# Altium PCB ultrasonic_tank_monitor.PcbDoc
Units mm, origin at the board's own origin, x right, y up, seen from the top; angles counter-clockwise.
Board outline 80.25 x 90.25 mm, 2 copper layers (Top Layer, Bottom Layer), stack 1.57 mm thick; 63 components, 38 nets, 216 pads, 0 vias.
Unrouted connection lines stored in the file: 149.
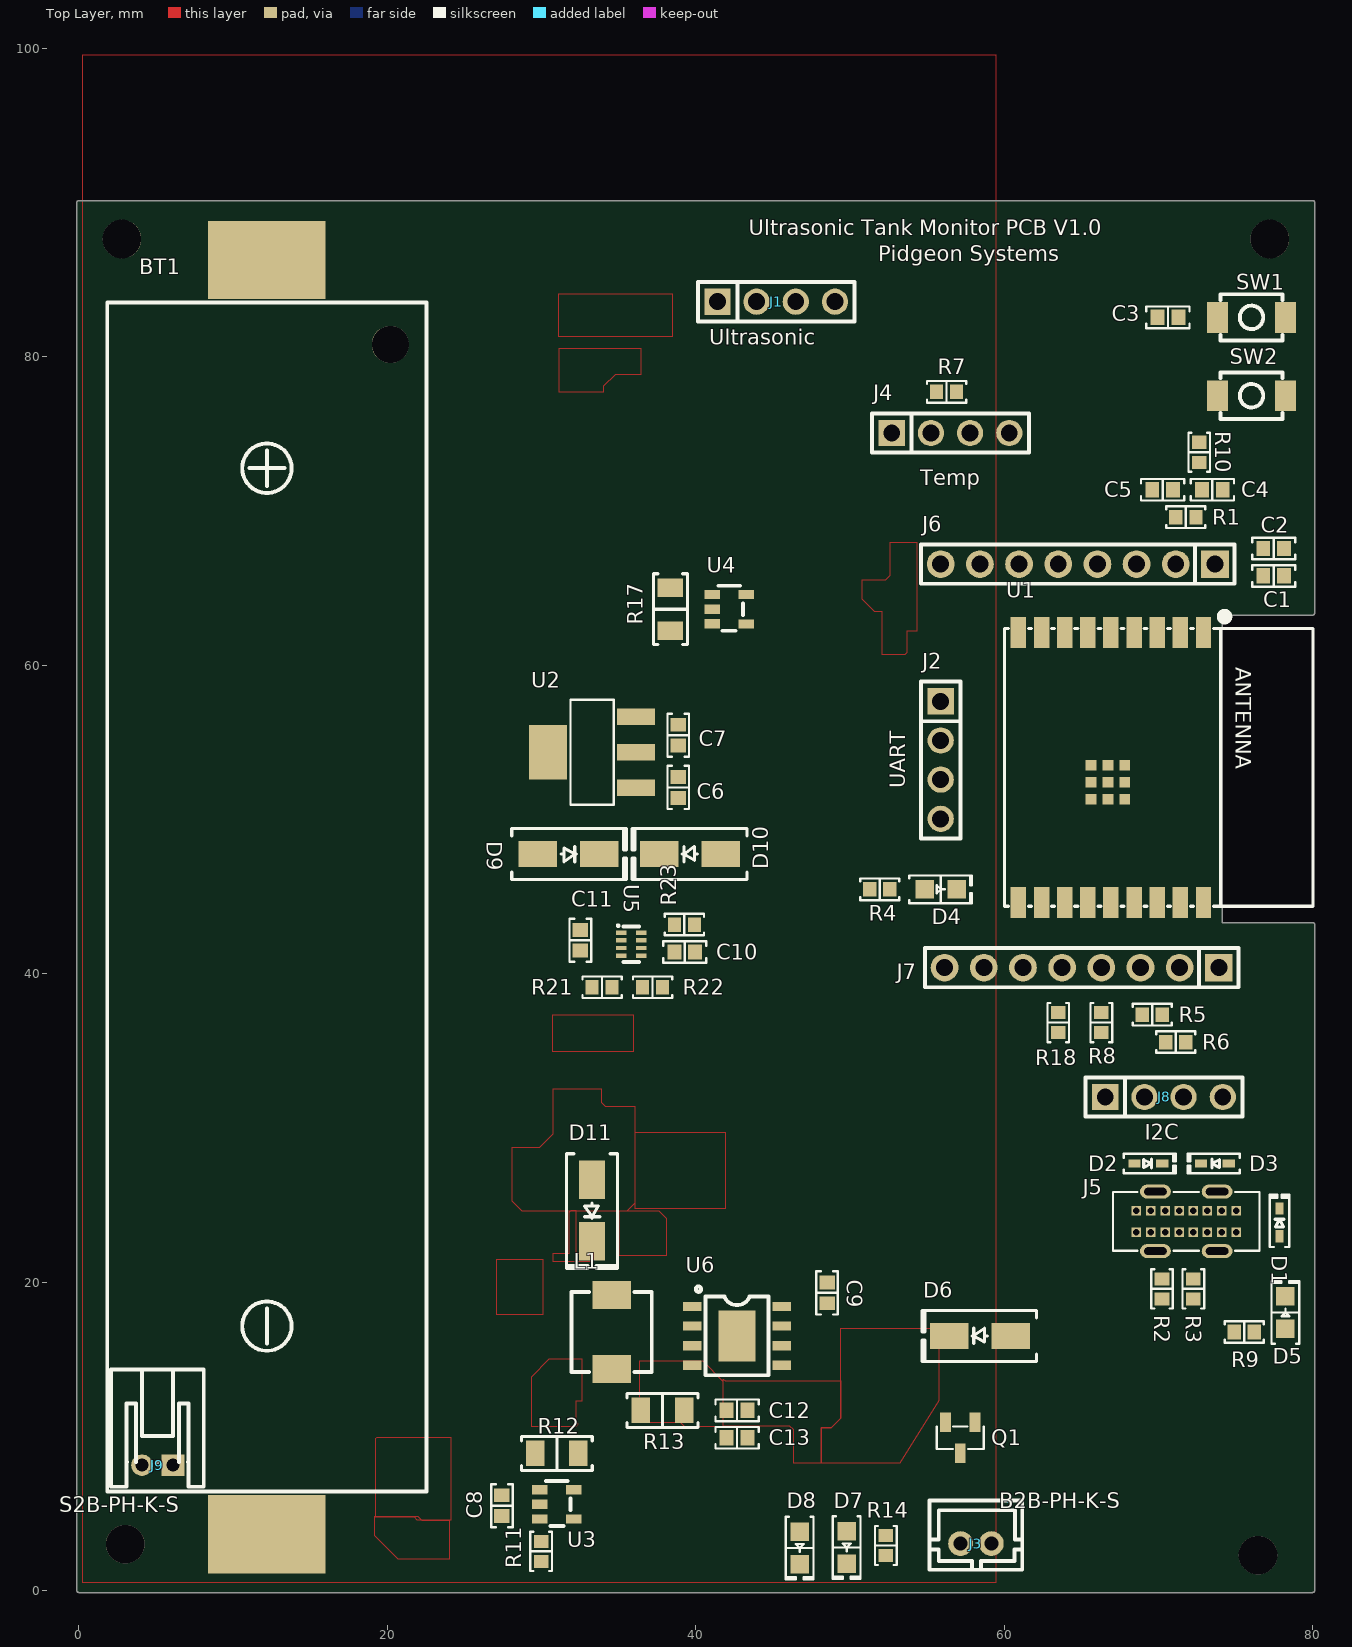
[diagram p0: Top Layer view]
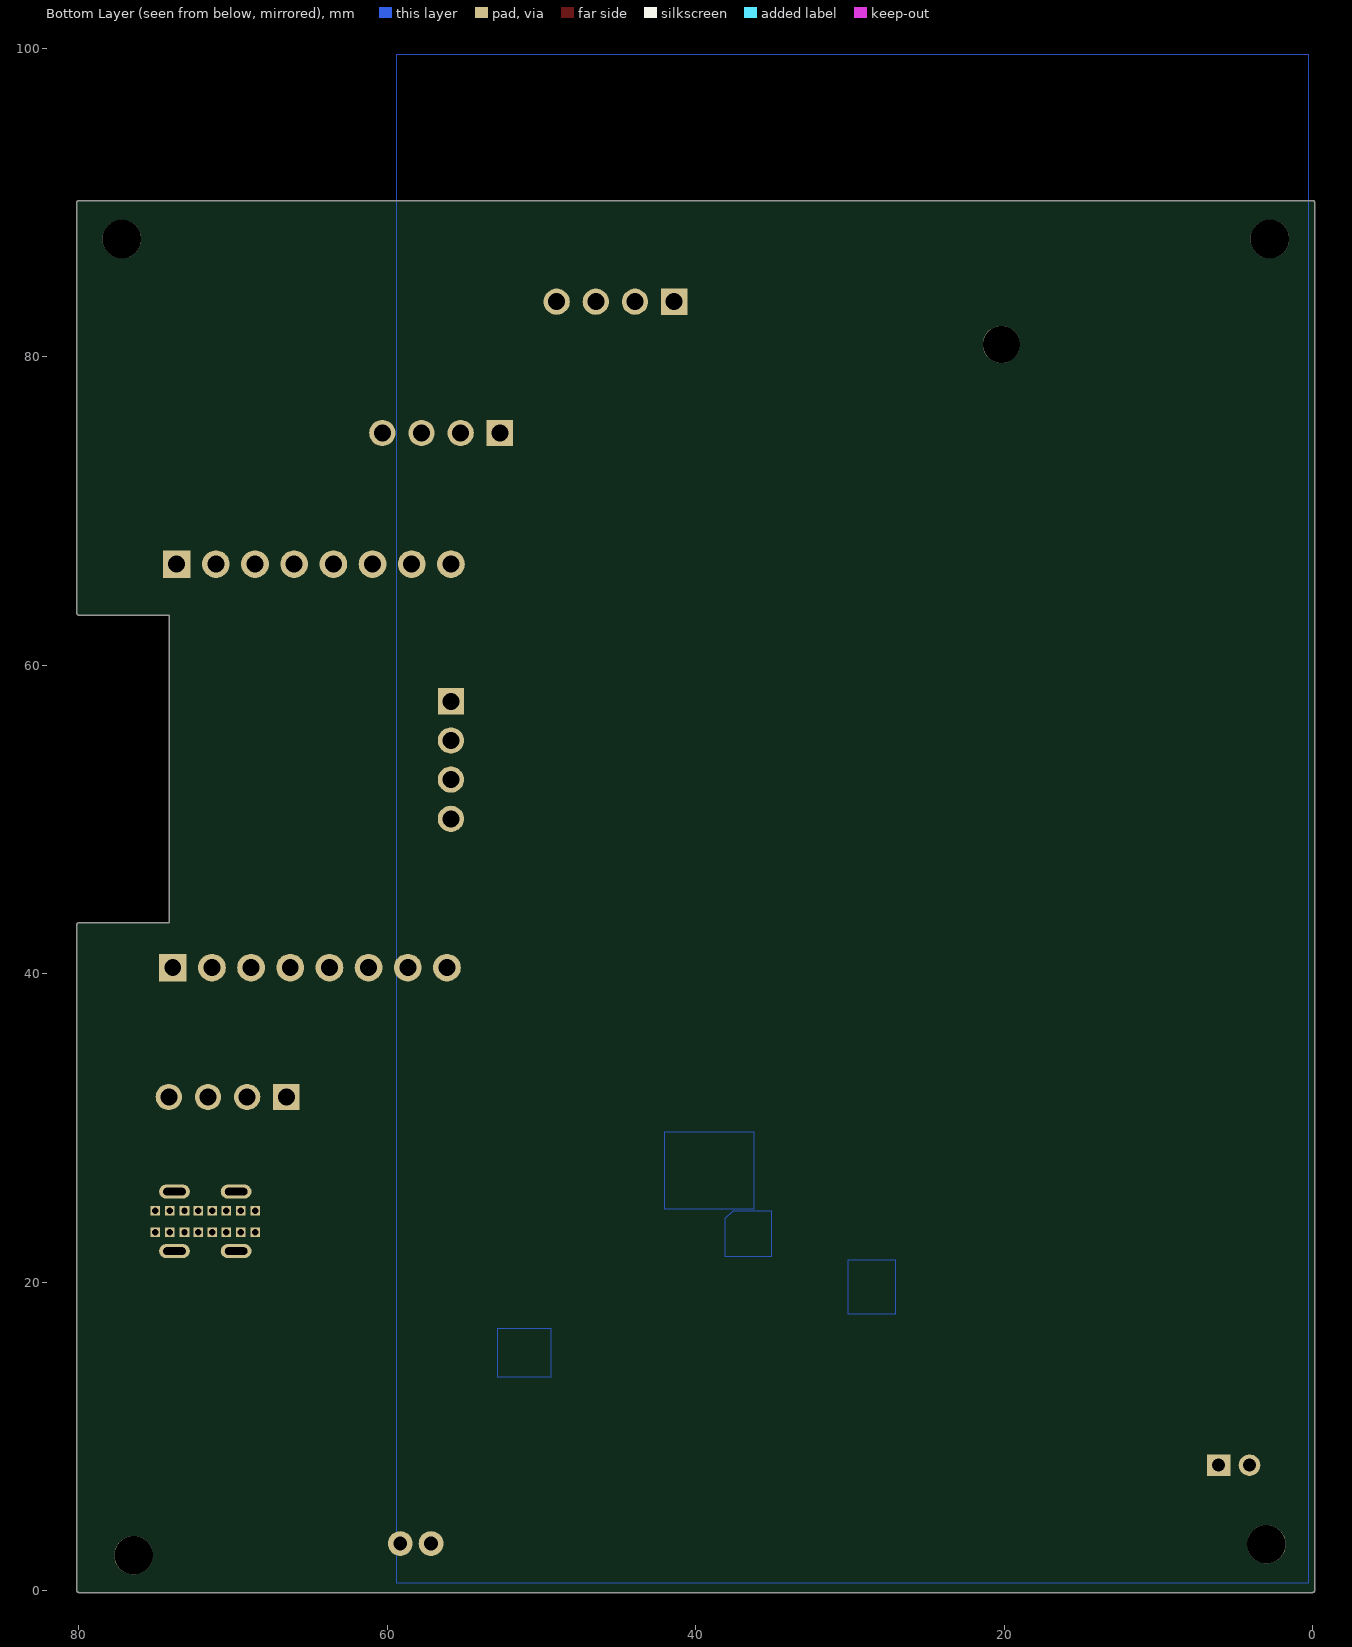
[diagram p1: Bottom Layer view, seen from below]

## Layer stack, top to bottom
Top Solder: solder mask 0.0127, Solder Resist, Dk 3.8
Top Layer: signal copper 0.035
Dielectric: core 1.5, FR-4, Dk 4.5
Bottom Layer: signal copper 0.035
Bottom Solder: solder mask 0.0127, Solder Resist, Dk 3.8

## Board outline
-0.127,0 -0.127,90 cw(c0,90) 0,90.127 80,90.127 cw(c80,90) 80.127,90 80.127,63.373 cw(c80,63.373) 80,63.246 74.127,63.246 74.127,43.307 80,43.307 cw(c80,43.18) 80.127,43.18 80.127,0 cw(c80,0) 80,-0.127 0,-0.127 cw(c0,0)

## Design rules (kind name [scope] priority, off if disabled: settings)
BoardOutlineClearance [All] p1: gap=0.2 ignorepadtopadclearanceinfootprint=FALSE
Clearance [All] p1: gap=0.127 ignorepadtopadclearanceinfootprint=FALSE except(0.125: Arc-Text Track-Text; 0.25: Arc-Hole Track-Hole SMDPad-Hole THPad-Hole Via-Hole Fill-Hole Poly-Hole Region-Hole Text-Hole; 0.254: Arc-Via Track-Via Via-Via)
ComponentClearance [All] p1: gap=0.127 collisioncheckmode=3 verticalgap=0.127 showdistances=TRUE
DiffPairsRouting [All] p1: maxlimit=0.254 minlimit=0.127 mostfreqgap=0.127 toplayer_minwidth=0.127 toplayer_maxwidth=25.4 toplayer_prefwidth=0.127 bottomlayer_minwidth=0.127 bottomlayer_maxwidth=25.4 bottomlayer_prefwidth=0.127 maxuncoupledlength=12.7
Height [All] p1: minheight=0 maxheight=1816.048 prefheight=12.7
HoleSize [All] p1: absolutevalues=TRUE maxlimit=6.3 minlimit=0.3 maxpercent=80.000 minpercent=20.000
HoleToHoleClearance [All] p1: gap=0.25 allowstackedmicrovias=FALSE
MinimumAnnularRing [All] p1: minimumring=0.076
MinimumSolderMaskSliver [All] p1: minsoldermaskwidth=0
PlaneClearance [All] p1: clearance=0.127
PlaneConnect PlaneConnectPowerPads [InPadClass('PowerPads')] p1: planeconnectstyle=Direct reliefexpansion=0.508 reliefentries=4 reliefconductorwidth=0.254 reliefairgap=0.254
PlaneConnect PlaneConnectPowerClass [InNetClass('Power')] p2: planeconnectstyle=Direct reliefexpansion=0.508 reliefentries=4 reliefconductorwidth=0.254 reliefairgap=0.254
PlaneConnect [All] p3: pad.planeconnectstyle=Relief pad.reliefexpansion=0.3 pad.reliefentries=4 pad.reliefconductorwidth=0.127 pad.reliefairgap=0.127 via.planeconnectstyle=Direct via.reliefexpansion=0.3 via.reliefentries=4 via.reliefconductorwidth=0.127 via.reliefairgap=0.127
PolygonConnect PolygonConnectPowerPads [All vs (InPadClass('PowerPads'))] p1: connectstyle=Direct reliefconductorwidth=0.254 reliefentries=4 polygonreliefangle="90 Angle" airgapwidth=0.254
PolygonConnect [All] p2: connectstyle=Direct reliefconductorwidth=0.127 reliefentries=4 polygonreliefangle="90 Angle" airgapwidth=0.127
RoutingVias [All] p1: holewidth=0.3 width=0.6 viastyle="Through Hole" minholewidth=0.3 minwidth=0.6 maxholewidth=0.6 maxwidth=6.6
SilkToSilkClearance [All] p1: silktosilkclearance=0
SilkToSolderMaskClearance [IsPad] p1: minsilkscreentomaskgap=0.125 clearancetoexposedcopper=TRUE
SolderMaskExpansion SolderMaskExpansion_1 [IsVia] p1: expansion=0.102 istentingtop=TRUE
SolderMaskExpansion [All] p2: expansion=0.075 istentingtop=FALSE
Width [All] p1: maxlimit=25.4 minlimit=0.127 preferedwidth=0.127 minimp=50.000000 maximp=50.000000 favimp=50.000000
20 further rules are at their usual default settings.

## Classes and differential pairs
component class ultrasonic_tank_monitor_power: C6 C7 C11 C12 D9 D10 R21 R22 R23 U2 U5
component class ultrasonic_tank_monitor_battery: BT1 C8 C9 C10 C13 D6 D7 D8 D11 J3 J9 L1 Q1 R11 R12 R13 R14 U3 U6
component class ultrasonic_tank_monitor: C1 C2 C3 C4 C5 D1 D2 D3 D4 D5 J1 J2 J4 J5 J6 J7 J8 R1 R2 R3 R4 R5 R6 R7 R8 R9 R10 R17 R18 SW1 SW2 U1 U4
differential pair USB: +USB_P -USB_N

## Components (designator, comment, footprint, x,y, rotation, side; value= is the part's Value field where it differs from the comment)
BT1 "BH-18650-B1BA002" BATTERY-SMD_18650-1S-L77.1-W20.7-1 12.192,44.958 r0 top locked
C1 "10 µF" "CAP 0603_1608" 77.47,65.786 r180 top
C2 "0.1 µF" "CAP 0603_1608" 77.47,67.564 r180 top
C3 "1 µF" "CAP 0603_1608" 70.612,82.55 r0 top
C4 "1 µF" "CAP 0603_1608" 73.493,71.374 r180 top
C5 "0.1 µF" "CAP 0603_1608" 70.271,71.374 r0 top
C6 "4.7 µF" "CAP 0603_1608" 38.862,52.07 r270 top
C7 "4.7 µF" "CAP 0603_1608" 38.862,55.459 r90 top
C8 "1 µF" "CAP 0603_1608" 27.432,5.501 r90 top
C9 "10 µF" "CAP 0603_1608" 48.514,19.304 r270 top
C10 "10 µF" "CAP 0603_1608" 39.283,41.402 r180 top
C11 "1 µF" "CAP 0603_1608" 32.512,42.164 r270 top
C12 "1 µF" "CAP 0603_1608" 42.672,11.684 r180 top
C13 "10 µF" "CAP 0603_1608" 42.672,9.906 r180 top
D1 "VESD16C1-02V-G3-08" SOD523F 77.846,23.876 r90 top
D2 "VESD16C1-02V-G3-08" SOD523F 69.342,27.686 r0 top
D3 "VESD16C1-02V-G3-08" SOD523F 73.66,27.686 r180 top
D4 "Blue" "LED 0805_2012 BLUE" 55.88,45.466 r0 top
D5 "Red" "LED 0805_2012 RED" 78.232,18.034 r90 top
D6 "SS34-HF" "DO214AC SMA" 58.42,16.51 r180 top
D7 "Red" "LED 0805_2012 RED" 49.784,2.794 r270 top
D8 "Green" "LED 0805_2012 GREEN" 46.736,2.76 r270 top
D9 "SS34-HF" "DO214AC SMA" 31.75,47.752 r0 top
D10 "SS34-HF" "DO214AC SMA" 39.624,47.752 r180 top
D11 "SS34-HF" "DO214AC SMA" 33.274,24.638 r270 top
J1 "Ultrasonic" HDR-TH_4P-P2.54-V-M 45.212,83.566 r0 top
J2 "UART" HDR-TH_4P-P2.54-V-M 55.88,53.848 r270 top
J3 "B2B-PH-K-S" CONN-TH_B2B-PH-K-S 58.166,3.048 r0 top
J4 "Temp" HDR-TH_4P-P2.54-V-M 56.515,75.057 r0 top
J5 "TYPE-C 16PLC-H10.0" TYPE-C-TH_16PLC-H10.0 71.802,23.938 r180 top locked
J6 "HDR-TH_8P-P2.54" HDR-TH_8P-P2.54-V-M 73.66,66.548 r180 top
J7 "HDR-TH_8P-P2.54" HDR-TH_8P-P2.54-V-M 73.914,40.386 r180 top
J8 "I2C" HDR-TH_4P-P2.54-V-M 70.358,32.004 r0 top
J9 "S2B-PH-K-S" CONN-TH_S2B-PH-K-S-LF-SN 5.096,8.128 r0 top locked
L1 "4.7uH" IND-SMD_L5.2-W5.2_YSPI0530 34.544,16.764 r270 top
Q1 "SI2301-ZE" SOT-23-3_L2.9-W1.3-P1.90-LS2.4-BR 57.15,9.906 r90 top
R1 "10 kOhms" "RES 0603_1608" 71.77,69.596 r180 top
R2 "5.1K" "RES 0603_1608" 70.226,19.558 r90 top
R3 "5.1K" "RES 0603_1608" 72.258,19.558 r90 top
R4 "1 kOhms" "RES 0603_1608" 51.928,45.466 r180 top
R5 "4.7 kOhms" "RES 0603_1608" 69.596,37.338 r0 top
R6 "4.7 kOhms" "RES 0603_1608" 71.12,35.56 r180 top
R7 "4.7 kOhms" "RES 0603_1608" 56.261,77.724 r0 top
R8 "10 kOhms" "RES 0603_1608" 66.294,36.83 r270 top
R9 "2 kOhms" "RES 0603_1608" 75.56,16.764 r180 top
R10 "0 Ohms" "RES 0603_1608" 72.644,73.802 r270 top
R11 "100 Ohms" "RES 0603_1608" 29.972,2.54 r270 top
R12 "0 Ohms" "RES 1206_3216" 30.988,8.89 r180 top
R13 "200 mOhms" "RES 1206_3216" 37.846,11.684 r0 top
R14 "1 kOhms" "RES 0603_1608" 52.324,2.921 r90 top
R17 "0 Ohms" "RES 1206_3216" 38.354,63.627 r90 top
R18 "10 kOhms" "RES 0603_1608" 63.5,36.83 r270 top
R21 "3.6 kOhms" "RES 0603_1608" 33.924,39.116 r180 top
R22 "33 kOhms" "RES 0603_1608" 37.196,39.116 r180 top
R23 "10 kOhms" "RES 0603_1608" 39.258,43.18 r0 top
SW1 "TS-1185-B-A-B-A" SW-SMD_L4.0-W3.0-LS5.0 73.157,80.923 r0 top
SW2 "TS-1185-B-A-B-A" SW-SMD_L4.0-W3.0-LS5.0 73.157,75.843 r0 top
U1 "ESP32-C3" BULETM-SMD_ESPRESSIF_ESP32-C3-WROOM-02-N4-4MB 66.918,53.368 r270 top locked
U2 "AP7361C-33Y5-13" SOT-223_L6.5-W3.5-P2.30-LS7.0-BR 33.274,54.356 r0 top
U3 "SKCL3130ME" SOT-23-5_L2.9-W1.6-P0.95-LS2.8-BR 30.988,5.588 r180 top
U4 "AP22818AKBWT-7" SOT-23-5_L2.9-W1.6-P0.95-LS2.8-BR 42.164,63.627 r180 top
U5 "TPS2116DRLR" SOT-583-8_L2.1-W1.6-P0.50-LS1.6-BL 35.814,41.91 r270 top
U6 "TP5000-ESOP8" ESOP-8_L4.9-W3.9-P1.27-LS6.0-BL-EP 42.672,16.51 r270 top

## Footprints (in the part's own frame and the unit in brackets; to place one, negate y for a bottom-side part, rotate by r counter-clockwise, add the part's x,y. Pads: shape width x height; smd on the part's side, far side on the other; paste and mask are expansions set on the pad)
BATTERY-SMD_18650-1S-L77.1-W20.7-1 [mm]
  rect 7.62x5.08 smd paste+0 mask+0.051: 1(0,-41.313) 2(0,41.313)
  round 2.4 hole 2.4 unplated paste+0: ""(8,35.84)
  silkscreen extent -10.35,-38.54 10.35,38.54
BULETM-SMD_ESPRESSIF_ESP32-C3-WROOM-02-N4-4MB [mm]
  rect 2x1 smd paste+0 mask+0.05: 1(-8.75,6) 2(-8.75,4.5) 3(-8.75,3) 4(-8.75,1.5) 5(-8.75,0) 6(-8.75,-1.5) 7(-8.75,-3) 8(-8.75,-4.5) 9(-8.75,-6) 10(8.75,-6) 11(8.75,-4.5) 12(8.75,-3) 13(8.75,-1.5) 14(8.75,0) 15(8.75,1.5) 16(8.75,3) 17(8.75,4.5) 18(8.75,6)
  rect 0.7x0.7 smd paste+0 mask+0.05: 19(-0.14,0.9) 19(-0.14,-0.2) 19(-0.14,-1.3) 19(0.96,0.9) 19(0.96,-0.2) 19(0.96,-1.3) 19(2.06,-0.2) 19(2.06,0.9) 19(2.06,-1.3)
  silkscreen extent -10.03,-6.9 9,13.1
"CAP 0603_1608" [mm] "Chip Capacitor, 2-Leads, Body 1.60x0.80mm, IPC Medium Density"
  rect 0.9x1 smd: 1(-0.675,0) 2(0.675,0)
  silkscreen extent -1.4,-0.7 1.4,0.7, body extent -0.8,-0.41 0.8,0.41, height 0.82
CONN-TH_B2B-PH-K-S [mm]
  round 1.6 hole 0.9 paste+0 mask+0.051: 1(1,0) 2(-1,0)
  silkscreen extent -3,-1.7 3,2.8
CONN-TH_S2B-PH-K-S-LF-SN [mm]
  rect 1.5x1.4 hole 0.85 paste+0 mask+0.051: 1(1,0)
  round 1.4 hole 0.85 paste+0 mask+0.051: 2(-1,0)
  silkscreen extent -3,-1.4 3,6.2
"DO214AC SMA" [mm] "Molded Diode, 2-Leads, Body 4.30x2.60mm, IPC Medium Density"
  rect 2.5x1.7 smd: 1(-2,0) 2(2,0)
  silkscreen extent -3.68,-1.65 3.75,1.65, body extent -2.6,-1.37 2.6,1.37, height 2.4
ESOP-8_L4.9-W3.9-P1.27-LS6.0-BL-EP [mm]
  rect 0.6x1.2 smd paste+0 mask+0.051: 1(-1.905,-2.908) 2(-0.635,-2.908) 3(0.635,-2.908) 4(1.905,-2.908) 5(1.905,2.908) 6(0.635,2.908) 7(-0.635,2.908) 8(-1.905,2.908)
  rect 3.3x2.4 smd paste+0 mask+0.051: 9(0,0)
  silkscreen extent -3.2,-2.67 2.55,2.05
HDR-TH_4P-P2.54-V-M [mm]
  rect 1.7x1.7 hole 1.1 paste+0 mask+0.051: 1(-3.81,0)
  round 1.7 hole 1.1 paste+0 mask+0.051: 2(-1.27,0) 3(1.27,0) 4(3.81,0)
  silkscreen extent -5.08,-1.27 5.08,1.27
HDR-TH_8P-P2.54-V-M [mm] "8 pin header 2.54 pitch"
  rect 1.8x1.8 hole 1.1 paste+0 mask+0.051: 1(0,0)
  round 1.8 hole 1.1 paste+0 mask+0.051: 2(2.54,0) 3(5.08,0) 4(7.62,0) 5(10.16,0) 6(12.7,0) 7(15.24,0) 8(17.78,0)
  silkscreen extent -1.27,-1.27 19.05,1.27
IND-SMD_L5.2-W5.2_YSPI0530 [mm]
  rect 1.8x2.5 smd paste+0 mask+0.051: 1(-2.4,0) 2(2.4,0)
  silkscreen extent -2.6,-2.6 2.6,2.6
"LED 0805_2012 BLUE" [mm] "Chip Diode, 2-Leads, Body 2.00x1.25mm, IPC Medium Density"
  rect 1.2x1.2 smd: 1(-1.05,0) 2(1.05,0)
  silkscreen extent -2.03,-0.9 2.03,0.9, body extent -1,-0.62 1,0.63, height 0.9
"LED 0805_2012 GREEN" [mm] "Chip Diode, 2-Leads, Body 2.00x1.25mm, IPC Medium Density"
  rect 1.2x1.2 smd: 1(-1.05,0) 2(1.05,0)
  silkscreen extent -2.03,-0.9 2.03,0.9, body extent -1,-0.62 1,0.63, height 0.9
"LED 0805_2012 RED" [mm] "Chip Diode, 2-Leads, Body 2.00x1.25mm, IPC Medium Density"
  rect 1.2x1.2 smd: 1(-1.05,0) 2(1.05,0)
  silkscreen extent -2.03,-0.9 2.03,0.9, body extent -1,-0.62 1,0.63, height 0.9
"RES 0603_1608" [mm] "Chip Resistor, 2-Leads, Body 1.60x0.80mm, IPC Medium Density"
  rect 0.85x0.95 smd: 1(-0.65,0) 2(0.65,0)
  silkscreen extent -1.27,-0.7 1.27,0.7, body extent -0.8,-0.4 0.8,0.4, height 0.45
"RES 1206_3216" [mm] "Chip Resistor, 2-Leads, Body 3.13x1.55mm, IPC Medium Density"
  rect 1.2x1.65 smd: 1(-1.4,0) 2(1.4,0)
  silkscreen extent -2.3,-1.1 2.3,1.1, body extent -1.6,-0.8 1.6,0.8, height 0.6
SOD523F [mm] "SODFL, 2-Leads, Body 0.80x1.60mm, IPC Medium Density"
  rect 0.8x0.5 smd: 1(-0.9,0) 2(0.9,0)
  silkscreen extent -1.6,-0.64 1.8,0.64, body extent -0.8,-0.4 0.8,0.4, height 0.65
SOT-23-3_L2.9-W1.3-P1.90-LS2.4-BR [mm]
  rect 1.25x0.7 smd paste+0 mask+0.051: 1(1,-0.95) 2(1,0.95) 3(-1,0)
  silkscreen extent -0.73,-1.53 0.73,1.53
SOT-23-5_L2.9-W1.6-P0.95-LS2.8-BR [mm]
  rect 1x0.6 smd paste+0 mask+0.05: 1(1.1,-0.95) 2(1.1,0) 3(1.1,0.95) 4(-1.1,0.95) 5(-1.1,-0.95)
  silkscreen extent -0.89,-1.52 0.7,1.4
SOT-223_L6.5-W3.5-P2.30-LS7.0-BR [mm]
  rect 2.465x1.05 smd paste+0 mask+0.051: 1(2.857,-2.3) 2(2.857,0) 3(2.857,2.3)
  rect 2.465x3.54 smd paste+0 mask+0.051: 4(-2.857,0)
  silkscreen extent -1.4,-3.4 1.4,3.4
SOT-583-8_L2.1-W1.6-P0.50-LS1.6-BL [mm]
  rect 0.28x0.68 smd paste+0 mask+0.051: 1(-0.75,-0.64) 2(-0.25,-0.64) 3(0.25,-0.64) 4(0.75,-0.64) 5(0.75,0.64) 6(0.25,0.64) 7(-0.25,0.64) 8(-0.75,0.64)
  silkscreen extent -1.27,-0.92 1.14,0.51
SW-SMD_L4.0-W3.0-LS5.0 [mm] "SW-SMD_L4.0-W3.0-LS5.0"
  rect 1.35x2 smd paste+0 mask+0.051: 1(0.675,1.627) 2(5.075,1.627)
  silkscreen extent 0.88,0.13 4.88,3.13
TYPE-C-TH_16PLC-H10.0 [mm]
  rect 0.62x0.62 hole 0.42 paste+0 mask+0.05: A1(-3.25,0.7) A4(-2.3,0.7) A5(-1.35,0.7) A6(-0.45,0.7) A7(0.45,0.7) A8(1.35,0.7) A9(2.3,0.7) A12(3.25,0.7) B1(3.25,-0.7) B4(2.3,-0.7) B5(1.35,-0.7) B6(0.45,-0.7) B7(-0.45,-0.7) B8(-1.35,-0.7) B9(-2.3,-0.7) B12(-3.25,-0.7)
  oval 2x0.9 hole 0.5 slot 1.45 at 0 deg paste+0 mask+0.05: A2(-2,1.93) A10(2,1.93) B2(2,-1.93) B10(-2,-1.93)
  silkscreen extent -4.75,-1.9 4.75,1.9

## Part data
BT1: library part "18650 SMD battery holder", "18650 SMD battery holder", JLCPCB Part Class="Extended Part", manufacturer=MYOUNG(美阳), Contributor=lcsc, Manufacturer Part=BH-18650-B1BA002, spicePre=B, spiceSymbolName=BH-18650-B1BA002, Supplier=LCSC, Supplier Part=C2988620
C1 C9 C10 C13: library part GRM188R61A106ME69D, "CAP CER 10UF 10V X5R 0603", Device Package="0603 (1608 Metric)", manufacturer="Murata Electronics", Operating Temperature="-55°C ~ 85°C", Supplier Part Number 1=490-10475-1-ND, Temperature Coefficient=X5R, Tolerance=±20%, Voltage - Rated=10V, Applications="General Purpose", Capacitance="10 µF", componentlink1description=Datasheet, componentlink1url=https://search.murata.co.jp/Ceramy/image/img/A01X/G101/ENG/GRM188R61A106ME69-01.pdf, componentlink2description="DigiKey Link", componentlink2url=https://www.digikey.com/en/products/detail/murata-electronics/GRM188R61A106ME69D/5027560, lastupdated="3/06/2023 7:12:12 PM", Lifecycle Status=Active, Minimum Order=1, Mounting Type="Surface Mount, MLCC", Package / Case="0603 (1608 Metric)", packaging=TapeAndReel, Part Number=GRM188R61A106ME69D, Part Status=Active, partid=11157, price=0.01, series=GRM, Size / Dimension="0.063\" L x 0.031\" W (1.60mm x 0.80mm)", Supplier 1=DigiKey, Thickness (Max)="0.037\" (0.95mm)"
C2 C5: library part VJ0603Y104MXQCW1BC, "CAP CER 0.1UF 10V X7R 0603", Device Package="0603 (1608 Metric)", manufacturer="Vishay Vitramon", Operating Temperature="-55°C ~ 125°C", Supplier Part Number 1=720-VJ0603Y104MXQCW1BCCT-ND, Temperature Coefficient=X7R, Tolerance=±20%, Voltage - Rated=10V, Applications="General Purpose", Capacitance="0.1 µF", componentlink1description=Datasheet, componentlink1url=https://www.vishay.com/docs/28548/vjw1bcbascomseries.pdf, componentlink2description="DigiKey Link", componentlink2url=https://www.digikey.com/en/products/detail/vishay-vitramon/VJ0603Y104MXQCW1BC/8305323, lastupdated="3/06/2023 7:11:16 PM", Lifecycle Status=Active, Minimum Order=1, Mounting Type="Surface Mount, MLCC", Package / Case="0603 (1608 Metric)", packaging=TapeAndReel, Part Number=VJ0603Y104MXQCW1BC, Part Status=Active, partid=34594, price=0.01, series="VJ W1BC", Size / Dimension="0.063\" L x 0.031\" W (1.60mm x 0.80mm)", Supplier 1=DigiKey, Thickness (Max)="0.034\" (0.87mm)"
C3 C4 C8 C11 C12: library part LMK107B7105KAHT, "CAP CER 1UF 10V X7R 0603", Device Package="0603 (1608 Metric)", manufacturer="Taiyo Yuden", Operating Temperature="-55°C ~ 125°C", Ratings=AEC-Q200, Supplier Part Number 1=587-3410-1-ND, Temperature Coefficient=X7R, Tolerance=±10%, Voltage - Rated=10V, Applications=Automotive, Capacitance="1 µF", componentlink1description=Datasheet, componentlink1url="https://ds.yuden.co.jp/TYCOMPAS/ut/detail?pn=LMK107B7105KAHT  &u=M", componentlink2description="DigiKey Link", componentlink2url=https://www.digikey.com/en/products/detail/taiyo-yuden/LMK107B7105KAHT/4157759, Lifecycle Status=Active, Minimum Order=1, Mounting Type="Surface Mount, MLCC", Package / Case="0603 (1608 Metric)", packaging=TapeAndReel, Part Number=LMK107B7105KAHT, Part Status=Active, partid=13032, price=0.01, series=M, Size / Dimension="0.063\" L x 0.031\" W (1.60mm x 0.80mm)", Supplier 1=DigiKey, Thickness (Max)="0.035\" (0.90mm)"
  C3 C11 C12: lastupdated="17/09/2023 7:08:58 PM"
  C4 C8: lastupdated="3/06/2023 7:12:07 PM"
C6 C7: library part GRM188Z71C475KE21J, "CAP CER 4.7UF 16V X7R 0603", Device Package="0603 (1608 Metric)", manufacturer="Murata Electronics", Operating Temperature="-55°C ~ 125°C", Supplier Part Number 1=490-GRM188Z71C475KE21JCT-ND, Temperature Coefficient=X7R, Tolerance=±10%, Voltage - Rated=16V, Applications="General Purpose", Capacitance="4.7 µF", componentlink1description=Datasheet, componentlink1url=https://search.murata.co.jp/Ceramy/image/img/A01X/G101/ENG/GRM188Z71C475KE21-01A.pdf, componentlink2description="DigiKey Link", componentlink2url=https://www.digikey.com/en/products/detail/murata-electronics/GRM188Z71C475KE21J/16033436, lastupdated="15/10/2023 7:08:11 PM", Lifecycle Status=Active, Minimum Order=1, Mounting Type="Surface Mount, MLCC", Package / Case="0603 (1608 Metric)", packaging=TapeAndReel, Part Number=GRM188Z71C475KE21J, Part Status=Active, partid=41988, price=0.04, series=GRM, Size / Dimension="0.063\" L x 0.031\" W (1.60mm x 0.80mm)", Supplier 1=DigiKey, Thickness (Max)="0.039\" (1.00mm)"
D1 D2 D3: "ESD PROTECTION DIODE SOD-523", Capacitance @ Frequency="27pF @ 1MHz", Current - Peak Pulse (10/1000µs)="3.6A (8/20µs)", manufacturer="Vishay Semiconductor Diodes Division", Operating Temperature="-55°C ~ 150°C (TJ)", Package / Case="SC-79, SOD-523", Power - Peak Pulse=100W, Power Line Protection=No, Supplier Device Package=SOD-523, Supplier Part Number 1=VESD16C1-02V-G3-08GICT-ND, Voltage - Breakdown (Min)=17V, Voltage - Clamping (Max) @ Ipp=28V, Voltage - Reverse Standoff (Typ)="16V (Max)", Applications=Automotive, componentlink1description=Datasheet, componentlink1url=http://www.vishay.com/docs/86130/vesd01c1-02vtovesd33c1-02v.pdf, componentlink2description="DigiKey Link", componentlink2url=http://digikey.com/product-detail/en/vishay-semiconductor-diodes-division/VESD16C1-02V-G3-08/VESD16C1-02V-G3-08GICT-ND/9948019, lastupdated="14/08/2023 8:59:27 PM", Lifecycle Status=Active, Minimum Order=1, Mounting Type="Surface Mount", packaging=TapeAndReel, Part Number=VESD16C1-02V-G3-08, Part Status=Active, partid=9731, price=0.06, series="Automotive, AEC-Q101", Supplier 1=DigiKey, Type=Zener, Unidirectional Channels=1
D4: library part 5973605607F, "LED BLUE 0805 SMD", Current - Test=2mA, Device Package="0805 (2012 Metric)", Lens Color=0.93mm, manufacturer=Dialight, Millicandela Rating=15mcd, Supplier Device Package=0805, Supplier Part Number 1=350-4394-1-ND, Voltage - Forward (Vf) (Typ)=2.8V, Color=Blue, componentlink1description=Datasheet, componentlink1url=http://www.dialightsignalsandcomponents.com/Assets/Drawings/2D_Drawings_DrawingDetailedSpec/NewDrawings/18375A.pdf, componentlink2description="DigiKey Link", componentlink2url=https://www.digikey.com/en/products/detail/dialight/5973605607F/9385449, Configuration=Standard, Height (Max)=1.10mm, lastupdated="14/08/2023 8:25:57 PM", Lens Size="1.40mm x 1.25mm", Lens Style="Rectangle with Flat Top", Lifecycle Status=Active, Minimum Order=1, Mounting Type="Surface Mount", Package / Case="0805 (2012 Metric)", packaging=TapeAndReel, Part Number=5973605607F, Part Status=Active, partid=760, price=0.08, series=597, Size / Dimension="2.00mm L x 1.25mm W", Supplier 1=DigiKey, Viewing Angle=130°, Wavelength - Peak=468nm
D5 D7: library part 5990110007F, "LED RED 0805 SMD", Current - Test=20mA, Device Package="0805 (2012 Metric)", Lens Color=0.80mm, manufacturer=Dialight, Millicandela Rating=29mcd, Supplier Device Package=0805, Supplier Part Number 1=350-4353-1-ND, Voltage - Forward (Vf) (Typ)=2.1V, Color=Red, componentlink1description=Datasheet, componentlink1url=http://www.dialightsignalsandcomponents.com/Assets/Brochures_And_Catalogs/Indication/CBI_SMD_new/Dialight_CBI_data_599-0805_Apr2018.pdf, componentlink2description="DigiKey Link", componentlink2url=https://www.digikey.com/en/products/detail/dialight/5990110007F/9385408, Configuration=Standard, Height (Max)=0.80mm, lastupdated="15/06/2023 8:27:56 PM", Lens Size="1.40mm x 1.25mm", Lens Style="Rectangle with Flat Top", Lifecycle Status=Active, Minimum Order=1, Mounting Type="Surface Mount", Package / Case="0805 (2012 Metric)", packaging=TapeAndReel, Part Number=5990110007F, Part Status=Active, partid=308, price=0.04, series=599, Size / Dimension="2.00mm L x 1.25mm W", Supplier 1=DigiKey, Viewing Angle=140°, Wavelength - Dominant=633nm
D6 D9 D10 D11: "DIODE SCHOTTKY 40V 3A DO214AC", Capacitance @ Vr, F="450pF @ 4V, 1MHz", Current - Average Rectified (Io)=3A, Current - Reverse Leakage @ Vr="500 µA @ 40 V", manufacturer="Comchip Technology", Operating Temperature - Junction="-55°C ~ 125°C", Package / Case="DO-214AC, SMA", Supplier Device Package="DO-214AC (SMA)", Supplier Part Number 1=641-2115-1-ND, Voltage - DC Reverse (Vr) (Max)="40 V", Voltage - Forward (Vf) (Max) @ If="550 mV @ 3 A", componentlink1description=Datasheet, componentlink1url=http://www.comchiptech.com/admin/files/product/20190514101641.pdf, componentlink2description="DigiKey Link", componentlink2url=https://www.digikey.com/en/products/detail/comchip-technology/SS34-HF/10279693, Diode Type=Schottky, lastupdated="7/08/2023 8:38:18 PM", Lifecycle Status=Active, Minimum Order=1, Mounting Type="Surface Mount", packaging=TapeAndReel, Part Number=SS34-HF, Part Status=Active, partid=2138, price=0.07, series=-, Speed="Fast Recovery =< 500ns, > 200mA (Io)", Supplier 1=DigiKey
D8: library part 5990181007F, "LED GREEN 0805 SMD", Current - Test=20mA, Device Package="0805 (2012 Metric)", Lens Color=0.80mm, manufacturer=Dialight, Millicandela Rating=340mcd, Supplier Device Package=0805, Supplier Part Number 1=350-4358-1-ND, Voltage - Forward (Vf) (Typ)=3.2V, Color=Green, componentlink1description=Datasheet, componentlink1url=http://www.dialightsignalsandcomponents.com/Assets/Brochures_And_Catalogs/Indication/CBI_SMD_new/Dialight_CBI_data_599-0805_Apr2018.pdf, componentlink2description="DigiKey Link", componentlink2url=https://www.digikey.com/en/products/detail/dialight/5990181007F/9385413, Configuration=Standard, Height (Max)=0.80mm, lastupdated="15/06/2023 8:28:13 PM", Lens Size="1.40mm x 1.25mm", Lens Style="Rectangle with Flat Top", Lifecycle Status=Active, Minimum Order=1, Mounting Type="Surface Mount", Package / Case="0805 (2012 Metric)", packaging=TapeAndReel, Part Number=5990181007F, Part Status=Active, partid=272, price=0.15, series=599, Size / Dimension="2.00mm L x 1.25mm W", Supplier 1=DigiKey, Viewing Angle=140°, Wavelength - Dominant=525nm
J1 J2 J4 J8: library part HDR-TH_4P-P2.54
J3: "2 Pin JST PH 2.0 Connector Straight"
J5: JLCPCB Part Class="Extended Part", manufacturer="SHOU HAN(首韩)", Contributor=lcsc, Manufacturer Part="TYPE-C 16PLC-H10.0", spicePre=U, spiceSymbolName="TYPE-C 16PLC-H10.0", Supplier=LCSC, Supplier Part=C3151747
J9: "2 Pin JST PH 2.0 Connector RA"
L1: library part "4.7uH 5.2x5.4 SMD 3.5A", "2.2uH 1.5A Power Inductor 3x3", JLCPCB Part Class="Extended Part", manufacturer="TAIYO YUDEN(太诱)", Manufacturer Part=NR3015T2R2M, nameAlias=Value, spicePre=L, spiceSymbolName=NR3015T2R2M, Supplier=LCSC, Supplier Part=C86423
Q1: "P-CHAN Mosfet SI2301", JLCPCB Part Class="Extended Part", manufacturer="HXY MOSFET(华轩阳电子)", Contributor=lcsc, Manufacturer Part=SI2301-ZE, spicePre=U, spiceSymbolName=SI2301-ZE, Supplier=LCSC, Supplier Part=C5261052
R1 R8 R18 R23: library part CRCW060310K0JNEB, "RES SMD 10K OHM 5% 1/10W 0603", Device Package="0603 (1608 Metric)", manufacturer="Vishay Dale", Operating Temperature="-55°C ~ 155°C", Power (Watts)="0.1W, 1/10W", Ratings=AEC-Q200, Supplier Device Package=0603, Supplier Part Number 1=541-CRCW060310K0JNEBCT-ND, Temperature Coefficient=±200ppm/°C, Tolerance=±5%, componentlink1description=Datasheet, componentlink1url=http://www.vishay.com/docs/20035/dcrcwe3.pdf, componentlink2description="DigiKey Link", componentlink2url=https://www.digikey.com/en/products/detail/vishay-dale/CRCW060310K0JNEB/5070677, Composition="Thick Film", Features="Automotive AEC-Q200", Height - Seated (Max)="0.020\" (0.50mm)", Lifecycle Status=Active, Minimum Order=1, Number of Terminations=2, Package / Case="0603 (1608 Metric)", packaging=CutTape, Part Number=CRCW060310K0JNEB, Part Status=Active, partid=56621, price=0.01, Resistance="10 kOhms", series=CRCW, Size / Dimension="0.063\" L x 0.033\" W (1.60mm x 0.85mm)", Supplier 1=DigiKey
  R1 R18 R23: lastupdated="3/06/2023 7:37:02 PM"
  R8: lastupdated="16/10/2023 7:33:33 PM"
R2 R3: library part RMEF0603JT5K10, "RES 5.1K OHM 5% 1/10W 0603", Device Package="0603 (1608 Metric)", manufacturer="Stackpole Electronics Inc", Operating Temperature="-55°C ~ 155°C", Power (Watts)="0.1W, 1/10W", Ratings="7C1 RoHS w/out Exemption (100% Pb-Free), AEC-Q200", Resistance="5.1 kOhms", Supplier Device Package=0603, Supplier Part Number 1=738-RMEF0603JT5K10CT-ND, Temperature Coefficient=±100ppm/°C, Tolerance=±5%, componentlink1description=Datasheet, componentlink1url=https://www.seielect.com/Catalog/SEI-RMEF.pdf, componentlink2description="DigiKey Link", componentlink2url=https://www.digikey.com/en/products/detail/stackpole-electronics-inc/RMEF0603JT5K10/16839740, Composition="Thick Film", Features="Automotive AEC-Q200", Height - Seated (Max)="0.020\" (0.50mm)", lastupdated="22/08/2023 7:30:12 PM", Lifecycle Status=Active, Minimum Order=1, Number of Terminations=2, Package / Case="0603 (1608 Metric)", packaging=TapeAndReel, Part Number=RMEF0603JT5K10, Part Status=Active, partid=69491, price=0.01, series=RMEF, Size / Dimension="0.063\" L x 0.031\" W (1.60mm x 0.80mm)", Supplier 1=DigiKey
R4: library part "WR06X102 JTL", "RES 1K OHM 5% 1/10W 0603", Device Package="0603 (1608 Metric)", manufacturer="Walsin Technology Corporation", Operating Temperature="-55°C ~ 155°C", Power (Watts)="0.1W, 1/10W", Supplier Device Package=0603, Supplier Part Number 1=1292-WR06X102JTLCT-ND, Temperature Coefficient=±100ppm/°C, Tolerance=±5%, componentlink1description=Datasheet, componentlink1url=https://www.passivecomponent.com/wp-content/uploads/chipR/ASC_WR.pdf, componentlink2description="DigiKey Link", componentlink2url=https://www.digikey.com/en/products/detail/walsin-technology-corporation/WR06X102-JTL/13241138, Composition="Thick Film", Height - Seated (Max)="0.024\" (0.60mm)", lastupdated="14/08/2023 7:39:30 PM", Lifecycle Status=Active, Minimum Order=1, Number of Terminations=2, Package / Case="0603 (1608 Metric)", packaging=CutTape, Part Number="WR06X102 JTL", Part Status=Active, partid=61985, price=0.01, Resistance="1 kOhms", series=WR, Size / Dimension="0.063\" L x 0.031\" W (1.60mm x 0.80mm)", Supplier 1=DigiKey
R5 R6 R7: library part WR06X4701FTL, "RES 4.7K OHM 1% 1/10W 0603", Device Package="0603 (1608 Metric)", manufacturer="Walsin Technology Corporation", Operating Temperature="-55°C ~ 155°C", Power (Watts)="0.1W, 1/10W", Supplier Device Package=0603, Supplier Part Number 1=1292-WR06X4701FTLCT-ND, Temperature Coefficient=±100ppm/°C, Tolerance=±1%, componentlink1description=Datasheet, componentlink1url=https://www.passivecomponent.com/wp-content/uploads/chipR/ASC_WR.pdf, componentlink2description="DigiKey Link", componentlink2url=https://www.digikey.com/en/products/detail/walsin-technology-corporation/WR06X4701FTL/13240840, Composition="Thick Film", Height - Seated (Max)="0.024\" (0.60mm)", lastupdated="31/08/2023 7:31:34 PM", Lifecycle Status=Active, Minimum Order=1, Number of Terminations=2, Package / Case="0603 (1608 Metric)", packaging=CutTape, Part Number=WR06X4701FTL, Part Status=Active, partid=67913, price=0.01, Resistance="4.7 kOhms", series=WR, Size / Dimension="0.063\" L x 0.031\" W (1.60mm x 0.80mm)", Supplier 1=DigiKey
R9: library part RC0603JR-102KL, "RES 2K OHM 5% 1/10W 0603", Device Package="0603 (1608 Metric)", manufacturer=Yageo, Operating Temperature="-55°C ~ 155°C", Power (Watts)="0.1W, 1/10W", Supplier Device Package=0603, Supplier Part Number 1=13-RC0603JR-102KLCT-ND, Temperature Coefficient=±100ppm/°C, Tolerance=±5%, componentlink1description=Datasheet, componentlink1url=https://www.yageo.com/upload/media/product/productsearch/datasheet/rchip/PYu-RC_Group_51_RoHS_L_11.pdf, componentlink2description="DigiKey Link", componentlink2url=https://www.digikey.com/en/products/detail/yageo/RC0603JR-102KL/14286411, Composition="Thick Film", Height - Seated (Max)="0.022\" (0.55mm)", lastupdated="14/08/2023 7:39:28 PM", Lifecycle Status=Active, Minimum Order=1, Number of Terminations=2, Package / Case="0603 (1608 Metric)", packaging=CutTape, Part Number=RC0603JR-102KL, Part Status=Active, partid=65479, price=0.01, Resistance="2 kOhms", series=RC_L, Size / Dimension="0.063\" L x 0.031\" W (1.60mm x 0.80mm)", Supplier 1=DigiKey
R10: library part "WR06X000 PTL", "RES SMD 0.0 JUMPER 1/10W 0603", Device Package="0603 (1608 Metric)", manufacturer="Walsin Technology Corporation", Operating Temperature="-55°C ~ 155°C", Supplier Device Package=0603, Supplier Part Number 1=1292-WR06X000PTLCT-ND, Tolerance=Jumper, componentlink2description="DigiKey Link", componentlink2url=https://www.digikey.com/en/products/detail/walsin-technology-corporation/WR06X000-PTL/5978108, Composition="Thick Film", Height - Seated (Max)="0.024\" (0.60mm)", lastupdated="15/06/2023 7:41:49 PM", Lifecycle Status=Active, Minimum Order=1, Number of Terminations=2, Package / Case="0603 (1608 Metric)", packaging=CutTape, Part Number="WR06X000 PTL", Part Status=Active, partid=77887, price=0.01, Resistance="0 Ohms", series=WR, Size / Dimension="0.063\" L x 0.031\" W (1.60mm x 0.80mm)", Supplier 1=DigiKey
R11: library part "WR06X101 JTL", "RES 100 OHM 5% 1/10W 0603", Device Package="0603 (1608 Metric)", manufacturer="Walsin Technology Corporation", Operating Temperature="-55°C ~ 155°C", Power (Watts)="0.1W, 1/10W", Supplier Device Package=0603, Supplier Part Number 1=1292-WR06X101JTLCT-ND, Temperature Coefficient=±100ppm/°C, Tolerance=±5%, componentlink1description=Datasheet, componentlink1url=https://www.passivecomponent.com/wp-content/uploads/chipR/ASC_WR.pdf, componentlink2description="DigiKey Link", componentlink2url=https://www.digikey.com/en/products/detail/walsin-technology-corporation/WR06X101-JTL/13241290, Composition="Thick Film", Height - Seated (Max)="0.024\" (0.60mm)", lastupdated="17/09/2023 7:32:41 PM", Lifecycle Status=Active, Minimum Order=1, Number of Terminations=2, Package / Case="0603 (1608 Metric)", packaging=CutTape, Part Number="WR06X101 JTL", Part Status=Active, partid=62337, price=0.01, Resistance="100 Ohms", series=WR, Size / Dimension="0.063\" L x 0.031\" W (1.60mm x 0.80mm)", Supplier 1=DigiKey
R12 R17: library part RCL06120000Z0EA, "RES SMD 0 OHM 3/4W 1206 WIDE", Device Package="1206 (3216 Metric)", manufacturer="Vishay Dale", Operating Temperature="-55°C ~ 155°C", Power (Watts)="0.75W, 3/4W", Ratings=AEC-Q200, Supplier Device Package=0612, Supplier Part Number 1=RCL0.0CCT-ND, Tolerance=Jumper, componentlink1description=Datasheet, componentlink1url=http://www.vishay.com/docs/20046/rcle3.pdf, componentlink2description="DigiKey Link", componentlink2url=https://www.digikey.com/en/products/detail/vishay-dale/RCL06120000Z0EA/2587612, Composition="Thick Film", Features="Automotive AEC-Q200", Height - Seated (Max)="0.026\" (0.65mm)", lastupdated="17/09/2023 7:43:47 PM", Lifecycle Status=Active, Minimum Order=1, Number of Terminations=2, Package / Case="1206 (3216 Metric)", packaging=TapeAndReel, Part Number=RCL06120000Z0EA, Part Status=Active, partid=66283, price=0.02, Resistance="0 Ohms", series=RCL, Size / Dimension="0.063\" L x 0.126\" W (1.60mm x 3.20mm)", Supplier 1=DigiKey
R13: library part PT1206FR-7W0R2L, "RES 0.2 OHM 1% 1/2W 1206", Device Package="1206 (3216 Metric)", manufacturer=Yageo, Operating Temperature="-55°C ~ 155°C", Power (Watts)="0.5W, 1/2W", Ratings=AEC-Q200, Supplier Device Package=1206, Supplier Part Number 1=13-PT1206FR-7W0R2LCT-ND, Temperature Coefficient=±75ppm/°C, Tolerance=±1%, componentlink1description=Datasheet, componentlink1url=https://www.yageo.com/upload/media/product/productsearch/datasheet/rchip/PYu-PT-Group_521_RoHS_L_2.pdf, componentlink2description="DigiKey Link", componentlink2url=https://www.digikey.com/en/products/detail/yageo/PT1206FR-7W0R2L/5915393, Composition="Thick Film", Features="Automotive AEC-Q200, Current Sense, Moisture Resistant", Height - Seated (Max)="0.026\" (0.65mm)", lastupdated="15/10/2023 7:41:45 PM", Lifecycle Status=Active, Minimum Order=1, Number of Terminations=2, Package / Case="1206 (3216 Metric)", packaging=TapeAndReel, Part Number=PT1206FR-7W0R2L, partid=79151, price=0.06, Resistance="200 mOhms", series=PT, Size / Dimension="0.122\" L x 0.063\" W (3.10mm x 1.60mm)", Supplier 1=DigiKey
R14: library part SR0603JR-7T1KL, "RES 1K OHM 5% 1/4W 0603", Device Package="0603 (1608 Metric)", manufacturer=Yageo, Operating Temperature="-55°C ~ 155°C", Power (Watts)="0.25W, 1/4W", Ratings=AEC-Q200, Supplier Device Package=0603, Supplier Part Number 1=YAG6166CT-ND, Temperature Coefficient=±100ppm/°C, Tolerance=±5%, componentlink1description=Datasheet, componentlink1url=http://www.yageo.com/NewPortal/_en/search/productDocs.jsp?YageoPartNumber=SR0603JR-7T1KL, componentlink2description="DigiKey Link", componentlink2url=https://www.digikey.com/en/products/detail/yageo/SR0603JR-7T1KL/9696404, Composition="Thick Film", Features="Automotive AEC-Q200, Pulse Withstanding", Height - Seated (Max)="0.022\" (0.55mm)", lastupdated="15/06/2023 7:42:39 PM", Lifecycle Status=Active, Minimum Order=1, Number of Terminations=2, Package / Case="0603 (1608 Metric)", packaging=TapeAndReel, Part Number=SR0603JR-7T1KL, Part Status=Active, partid=23945, price=0.03, Resistance="1 kOhms", series=SR, Size / Dimension="0.063\" L x 0.031\" W (1.60mm x 0.80mm)", Supplier 1=DigiKey
R21: library part RT0603FRE073K6L, "RES SMD 3.6K OHM 1% 1/10W 0603", Device Package="0603 (1608 Metric)", manufacturer=Yageo, Operating Temperature="-55°C ~ 155°C", Power (Watts)="0.1W, 1/10W", Supplier Device Package=0603, Supplier Part Number 1=13-RT0603FRE073K6LCT-ND, Temperature Coefficient=±50ppm/°C, Tolerance=±1%, componentlink1description=Datasheet, componentlink1url=https://www.yageo.com/upload/media/product/productsearch/datasheet/rchip/PYu-RT_1-to-0.01_RoHS_L_12.pdf, componentlink2description="DigiKey Link", componentlink2url=https://www.digikey.com/en/products/detail/yageo/RT0603FRE073K6L/1075353, Composition="Thin Film", Height - Seated (Max)="0.022\" (0.55mm)", lastupdated="16/10/2023 7:33:15 PM", Lifecycle Status=Active, Minimum Order=1, Number of Terminations=2, Package / Case="0603 (1608 Metric)", packaging=TapeAndReel, Part Number=RT0603FRE073K6L, Part Status=Active, partid=62601, price=0.01, Resistance="3.6 kOhms", series=RT, Size / Dimension="0.063\" L x 0.031\" W (1.60mm x 0.80mm)", Supplier 1=DigiKey
R22: library part WR06X3302FTL, "RES 33K OHM 1% 1/10W 0603", Device Package="0603 (1608 Metric)", manufacturer="Walsin Technology Corporation", Operating Temperature="-55°C ~ 155°C", Power (Watts)="0.1W, 1/10W", Supplier Device Package=0603, Supplier Part Number 1=1292-WR06X3302FTLCT-ND, Temperature Coefficient=±100ppm/°C, Tolerance=±1%, componentlink1description=Datasheet, componentlink1url=https://www.passivecomponent.com/wp-content/uploads/chipR/ASC_WR.pdf, componentlink2description="DigiKey Link", componentlink2url=https://www.digikey.com/en/products/detail/walsin-technology-corporation/WR06X3302FTL/13239167, Composition="Thick Film", Height - Seated (Max)="0.024\" (0.60mm)", lastupdated="16/10/2023 7:33:13 PM", Lifecycle Status=Active, Minimum Order=1, Number of Terminations=2, Package / Case="0603 (1608 Metric)", packaging=CutTape, Part Number=WR06X3302FTL, Part Status=Active, partid=62382, price=0.01, Resistance="33 kOhms", series=WR, Size / Dimension="0.063\" L x 0.031\" W (1.60mm x 0.80mm)", Supplier 1=DigiKey
SW1 SW2: "Tactile Switch SMD 4x3x2 50mA", JLCPCB Part Class="Extended Part", manufacturer="XKB Connectivity(中国星坤)", Contributor=LCSC, Manufacturer Part=TS-1185-B-A-B-A, spicePre=S, spiceSymbolName=TS-1185-B-A-B-A, Supplier=LCSC, Supplier Part=C561517
U1: library part ESP32-C3-WROOM-02-N4(4MB), JLCPCB Part Class="Extended Part", manufacturer=ESPRESSIF(乐鑫), Manufacturer Part=ESP32-C3-WROOM-02-N4, Contributor=LCSC, spicePre=U, spiceSymbolName=ESP32-C3-WROOM-02-N4(4MB), Supplier=LCSC, Supplier Part=C2934560
U2: "3V3 LDO low drop out and low Iq"
U3: "1 cell battery protection IC Li-ion OC OV UV SOT 23-5", JLCPCB Part Class="Extended Part", manufacturer=SHIKUES(时科), Contributor=LCSC, Manufacturer Part=SKCL3130ME, spicePre=U, spiceSymbolName=SKCL3130ME, Supplier=LCSC, Supplier Part=C2941741
U4: "High active 2A load distribution switch"
U5: "2 IN 1 OUT Power MUX 1.6-5.5V 2.5A low-IQ"
U6: "1 cell Li-ion / LIFEPO4 cell charger switchmode"

## Free pads (board coordinates)
  round 2.5 hole 2.5 unplated mask+1.6: 17(2.794,87.63) 17(3,3) 17(76.454,2.286) 17(77.216,87.63)

## Nets (pads, with @x,y where several pads share a name; then routed paths per layer and width w, separated by ;. In a path a pad name is that pad's centre, name@x,y a point inside that pad or via, vN(x,y) a via of type N, cw(c..) or ccw(c..) an arc to the next point about the centre after c; other vN are vias at no path point)
3V3: C1.2 C2.2 C7.2 J2.1 J6.1 J8.1 R1.1 R4.2 R5.2 R6.2 R8.2 R17.1 U1.1 U2.3 U4.3
3V3_SWITCHED: J1.1 J4.1 R7.1 R17.2 U4.1 U4.5
B-: BT1.1 C8.2 J9.2 R12.2 U3.2
BOOT: C3.2 J6.8 SW1.1 U1.8
CC1: J5.A5 R3.2
CC2: J5.B5 R2.2
CHGR_IN: C9.2 D6.2 Q1.2 R14.1 U6.8
CHRG: D7.2 U6.7
GND: C1.1 C2.1 C3.1 C4.1 C5.1 C6.1 C7.1 C9.1 C10.1 C11.1 C12.1 C13.1 D1.1 D2.1 D3.1 D5.2 D11.1 J1.4 J2.4 J3.1 J4.4 J5.A1 J5.A12 J5.B1 J5.B12 J7.1 J7.8 J8.4 pad.17@77.216,87.63 R2.1 R3.1 R12.1 R18.2 R22.1 SW1.2 SW2.2 U1.9 U1.19 U2.2 U2.4 U3.4 U3.5 U4.2 U5.1 U6.2 U6.5
IO2: J7.4 R8.1 U1.16
IO3: J7.5 R18.1 U1.15 U4.4
IO4: J1.3 J6.3 U1.3
IO5: J1.2 J6.4 U1.4
IO6: J4.3 J6.5 R7.2 U1.5
IO7: J4.2 J6.6 U1.6
IO8: J6.7 U1.7
IO10: D4.2 J7.6 U1.10
LX: D11.2 L1.1 U6.1
NetC8_1: C8.1 R11.1 U3.3
NetD4_1: D4.1 R4.1
NetD5_1: D5.1 R9.1
NetD7_1: D7.1 D8.1 R14.2
NetR10_1: R10.1 SW2.1
PR1: R21.1 R22.2 U5.4
RST/EN: C4.2 C5.2 J6.2 R1.2 R10.2 U1.2
RXD: J2.3 U1.11
SCL: J7.3 J8.2 R5.1 U1.17
SDA: J7.2 J8.3 R6.1 U1.18
SOLAR_IN: J3.2 Q1.3
ST: R23.1 U5.8
STDBY: D8.2 U6.6
TXD: J2.2 U1.12
USB_N: D3.2 J5.A7 J5.B7 U1.13
USB_P: D2.2 J5.A6 J5.B6 U1.14
VBAT: BT1.2 C12.2 C13.2 D10.1 J7.7 J9.1 R11.2 R13.2 U5.6 U6.4
VBUS: C11.2 D1.2 D6.1 D9.1 J5.A4 J5.A9 J5.B4 J5.B9 Q1.1 R9.2 R21.2 R23.2 U5.3 U5.5
VOUT: C6.2 D9.2 D10.2 U2.1 U5.2 U5.7
VS: C10.2 L1.2 R13.1 U6.3
pads on no net: BT1. J5.A2 J5.A8 J5.A10 J5.B2 J5.B8 J5.B10 U3.1 U6.9

## Polygon pours and split planes (outlines as drawn)
GND on Top Layer "NONET_L01_P022" (solid, shelved, pour order 22): 59.436,0.508 0.254,0.508 0.254,99.568 59.436,99.568
3V3 on Top Layer "NONET_L01_P014" (solid, shelved, pour order 14): 53.594,60.706 53.721,60.833 53.721,62.23 54.356,62.23 54.356,67.945 52.578,67.945 52.578,65.786 52.292,65.5 50.753,65.5 50.753,64.309 51.562,63.5 52.07,63.5 52.07,60.706
3V3 on Top Layer "NONET_L01_P012" (solid, shelved, pour order 12): 36.449,80.518 31.115,80.518 31.115,77.724 34.036,77.724 34.036,78.105 34.798,78.867 36.449,78.867
VBUS on Top Layer "NONET_L01_P015" (solid, shelved, pour order 15): 48.133,8.255 48.133,10.541 48.768,10.541 49.403,11.176 49.403,17.018 55.753,17.018 55.753,12.319 53.213,8.255
VBUS on Top Layer "NONET_L01_P019" (solid, shelved, pour order 19): 30.099,17.907 30.099,21.463 27.051,21.463 27.051,17.907
VBAT on Top Layer "NONET_L01_P016" (solid, shelved, pour order 16): 36.068,24.765 36.068,29.718 41.91,29.718 41.91,24.765
3V3 on Top Layer "NONET_L01_P013" (solid, shelved, pour order 13): 35.941,34.925 30.734,34.925 30.734,37.338 35.941,37.338
3V3_SWITCHED on Top Layer "NONET_L01_P011" (solid, shelved, pour order 11): 38.481,81.28 31.115,81.28 31.115,84.074 38.481,84.074
B- on Top Layer "NONET_L01_P010" (solid, shelved, pour order 10): 24.13,9.906 19.304,9.906 19.224,9.826 19.224,4.771 21.734,4.771 21.902,4.604 24.13,4.604
VBAT on Top Layer "NONET_L01_P009" (solid, shelved, pour order 9): 32.639,12.319 32.639,14.986 30.48,14.986 29.337,13.843 29.337,10.668 32.258,10.668 32.385,10.795 32.258,10.922 32.258,12.319
VOUT on Top Layer "NONET_L01_P006" (solid, shelved, pour order 6): 30.734,21.844 30.734,21.336 33.274,21.336 33.274,21.844 32.258,21.844 32.258,24.638 31.877,24.638 31.75,24.511 31.75,21.844
VBUS on Top Layer "NONET_L01_P005" (solid, shelved, pour order 5): 35.052,21.717 35.052,24.638 37.592,24.638 38.1,24.13 38.1,21.717
VOUT on Top Layer "NONET_L01_P004" (solid, shelved, pour order 4): 30.734,32.512 30.734,29.591 29.845,28.702 28.067,28.702 28.067,25.273 28.702,24.638 35.56,24.638 36.068,25.146 36.068,31.369 34.163,31.369 33.909,31.623 33.909,32.512
NetC8_1 on Top Layer "NONET_L01_P003" (solid, shelved, pour order 3): 24.003,2.032 20.701,2.032 19.177,3.556 19.177,4.826 21.971,4.826 22.225,4.572 24.003,4.572
CHGR_IN on Top Layer "NONET_L01_P001" (solid, shelved, pour order 1): 41.783,10.668 41.783,13.55 40.474,14.859 36.322,14.859 36.322,10.922 38.989,10.922 39.243,10.668
no net on Top Layer "NONET_L01_P000" (solid, shelved, pour order 0): 48.133,8.255 46.355,8.255 46.355,10.414 46.101,10.668 41.783,10.668 41.783,13.716 41.91,13.589 49.403,13.589 49.403,11.176 48.768,10.541 48.133,10.541
GND on Bottom Layer "NONET_L02_P023" (solid, shelved, pour order 23): 59.436,0.508 0.254,0.508 0.254,99.568 59.436,99.568
VBUS on Bottom Layer "NONET_L02_P021" (solid, shelved, pour order 21): 49.403,13.848 49.408,13.843 52.832,13.843 52.832,17.018 49.403,17.018
VBUS on Bottom Layer "NONET_L02_P020" (solid, shelved, pour order 20): 30.108,17.905 30.108,21.461 27.06,21.461 27.06,17.905
VBAT on Bottom Layer "NONET_L02_P017" (solid, shelved, pour order 17): 36.195,24.765 36.195,29.718 42.037,29.718 42.037,24.765
VBUS on Bottom Layer "NONET_L02_P008" (solid, shelved, pour order 8): 35.08,21.687 35.08,24.608 37.62,24.608 38.128,24.1 38.128,21.687

## Silkscreen, mask and mechanical layers (free items; w line width, h text height)
Top Overlay:
  text "Ultrasonic Tank Monitor PCB V1.0" at 43.434,87.884 h1
  text "Pidgeon Systems" at 51.816,86.185 h1

## Text inside footprints (layer, text, board x,y; h text height)
U1: Top Overlay "ANTENNA" at 74.999,59.871 h1 r270